# Altium PCB STM32P100.PcbDoc (part 1 of 2)
Units mil, origin at the board's own origin, x right, y up, seen from the top; angles counter-clockwise.
Board outline 4100 x 1945 mil, 2 copper layers (Top Layer, Bottom Layer); 85 components, 168 nets, 446 pads, 248 vias.
Unrouted connection lines stored in the file: 48.
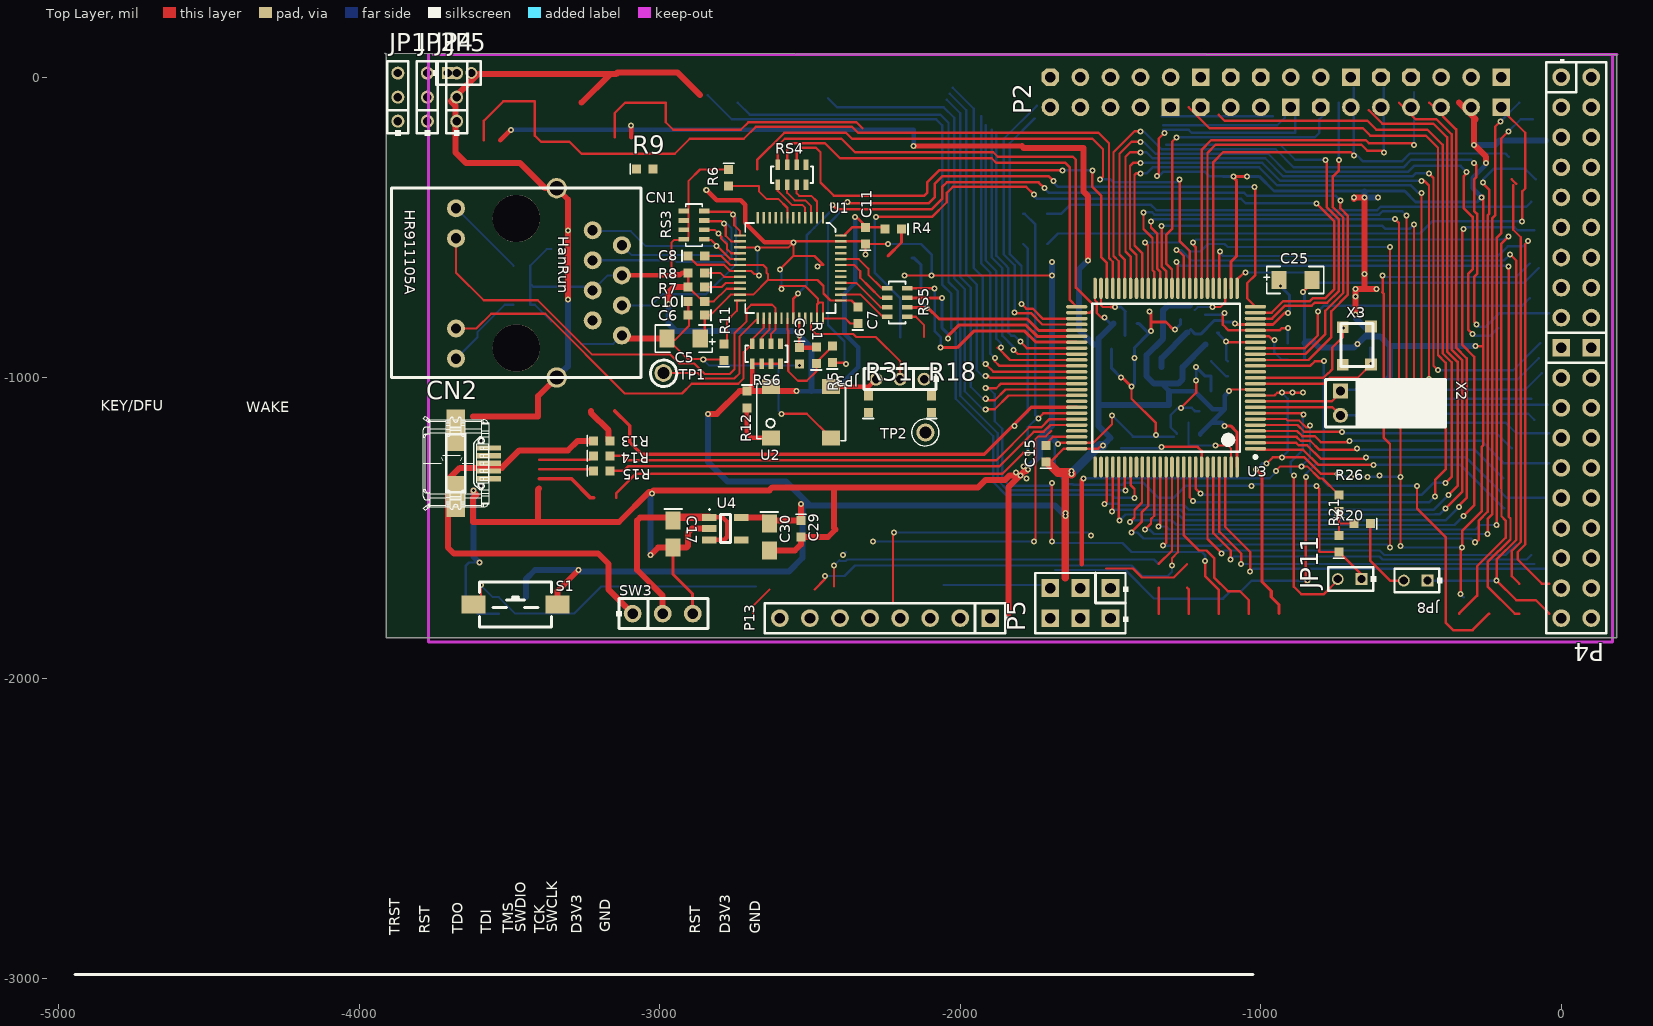
[diagram p0: Top Layer view]
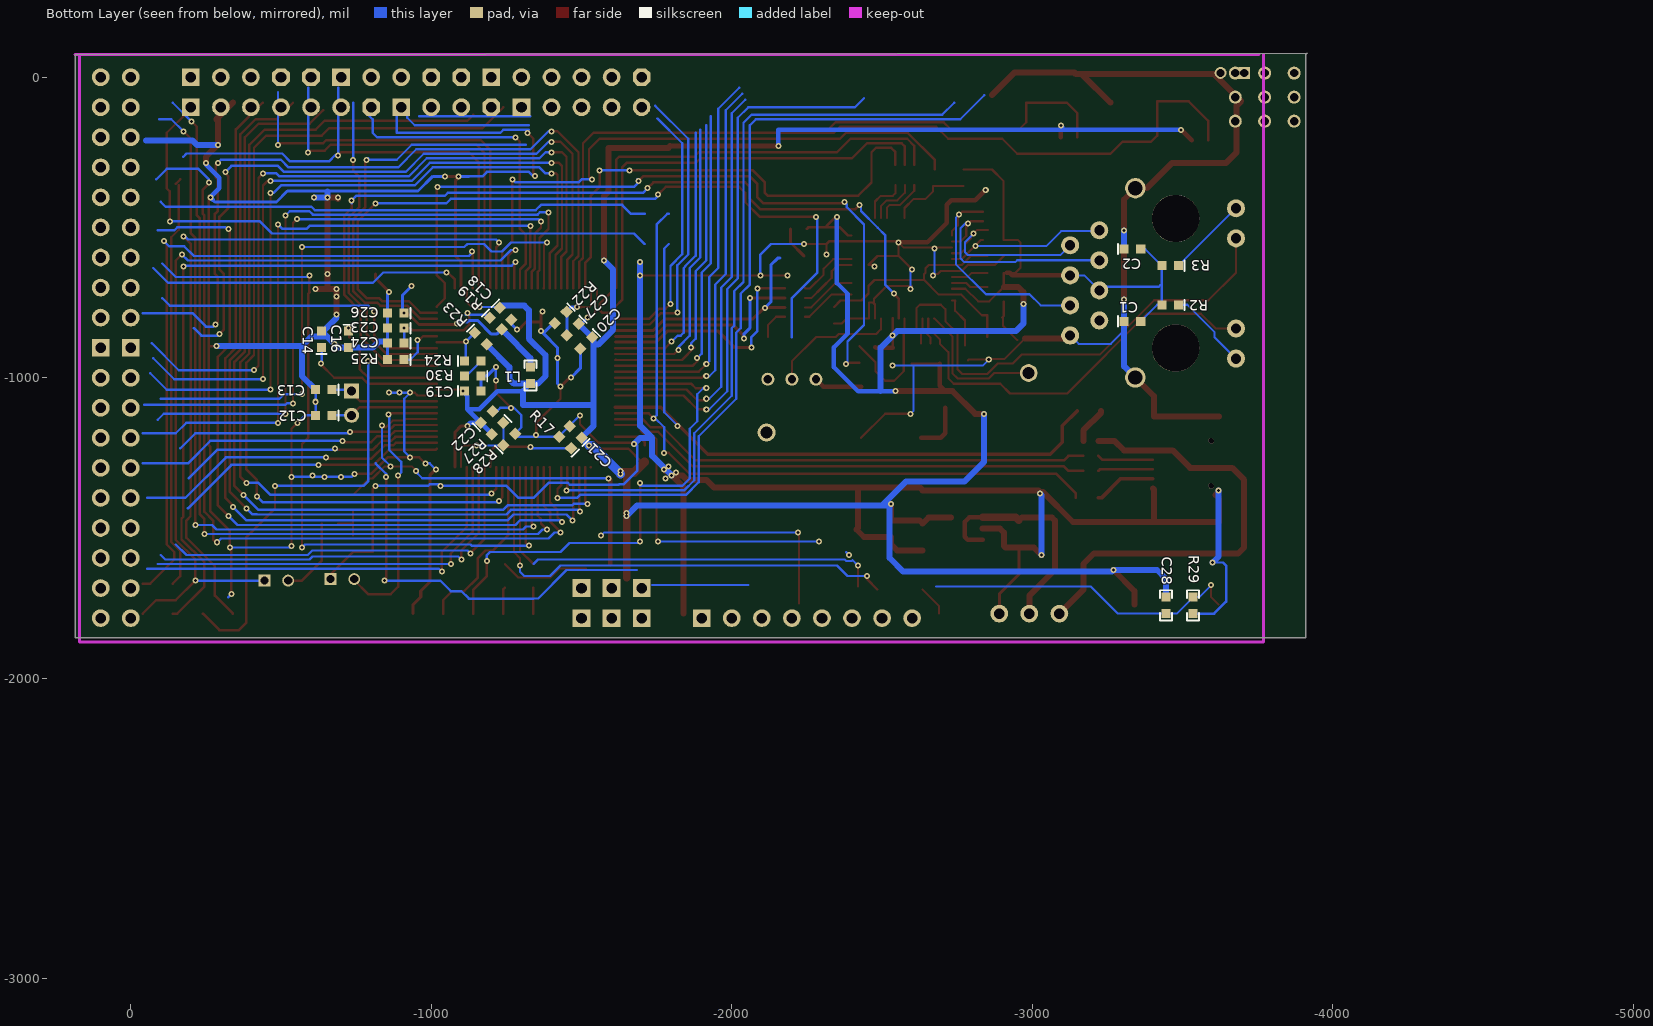
[diagram p1: Bottom Layer view, seen from below]

## Layer stack, top to bottom
Top Solder: solder mask 0.4, Solder Resist, Dk 3.5
Top Layer: signal copper 1.4
Dielectric1: dielectric 12.6, FR-4, Dk 4.8
Bottom Layer: signal copper 1.4
Bottom Solder: solder mask 0.4, Solder Resist, Dk 3.5

## Board outline
-3915,80 -3910,75 -3910,-1865 185,-1865 185,75

## Design rules (kind name [scope] priority, off if disabled: settings)
Clearance [All] p1: gap=7
PolygonConnect [All] p1: connectstyle=Relief reliefconductorwidth=10 reliefentries=4 polygonreliefangle="90 Angle" airgapwidth=10
RoomDefinition DP83848 [InComponentClass('DP83848')] p1: confinementstyle=ConfineIn formatcopy=TRUE lockcomponents=FALSE outline -3770,-1880 185,-1880 185,77.06 -3770,77.06
RoomDefinition STM32P100 [InComponentClass('STM32P100')] p2: confinementstyle=ConfineIn formatcopy=TRUE lockcomponents=FALSE outline -3765,-1875 185,-1875 185,77.5 -3765,77.5
RoutingVias [All] p1: holewidth=28 width=50 viastyle="Through Hole" minholewidth=10 minwidth=20 maxholewidth=10 maxwidth=20
SilkToSolderMaskClearance SilkscreenOverComponentPads [IsPad] p1: minsilkscreentomaskgap=10 clearancetoexposedcopper=TRUE
SolderMaskExpansion [All] p1: expansion=4
Width [All] p1: maxlimit=35 minlimit=7 preferedwidth=10 minimp=50.000000 maximp=50.000000 favimp=50.000000
28 further rules are at their usual default settings.

## Classes and differential pairs
component class DP83848: C1 C2 C5 C6 C7 C8 C9 C10 C11 CN1 JP3 R1 R2 R3 R4 R5 R6 R7 R8 R9 R11 R12 R18 R31 RS3 RS4 RS5 RS6 TP1 TP2 U1 U2
component class STM32P100: C12 C13 C14 C15 C16 C17 C18 C19 C20 C21 C22 C23 C24 C25 C26 C27 C28 C29 C30 CN2 JP1 JP2 JP4 JP5 JP8 JP11 L1 P2 P4 P5 P13 R13 R14 R15 R17 R19 R20 R21 R22 R23 R24 R25 R26 R27 R28 R29 R30 S1 SW3 U3 U4 X2 X3

## Components (designator, comment, footprint, x,y, rotation, side; value= is the part's Value field where it differs from the comment)
C1 "100nF" 0603M -3305.79,-812.32 r180 bottom
C2 "100nF" 0603M -3305.79,-572.32 r180 bottom
C5 "10uF" TAN-A -2920,-870 r0 top
C6 "100nF" 0603M -2850,-792 r180 top
C7 "100nF" 0603M -2340,-820 r90 top
C8 "100nF" 0603M -2905,-595 r0 top
C9 "100nF" 0603M -2535,-900 r270 top
C10 "100nF" 0603M -2905,-746 r0 top
C11 "100nF" 0603M -2315,-555 r90 top
C12 "10pF" 0603M -670,-1125 r0 bottom
C13 "10pF" 0603M -670,-1040 r0 bottom
C14 "20pF" 0603M -635,-900 r90 bottom
C15 "0.1uF" 0603M -1715,-1280 r90 top
C16 "20pF" 0603M -725,-845 r270 bottom
C17 "1uF" 0805M -2955,-1475 r270 top
C18 "100nF" 0603M -1227.5,-767.5 r225 bottom
C19 "100nF" 0603M -1110,-1045 r180 bottom
C20 "100nF" 0603M -1535,-865 r315 bottom
C21 "100nF" 0603M -1500,-1200 r45 bottom
C22 "100nF" 0603M -1165,-1150 r135 bottom
C23 "100nF" 0603M -910,-835 r0 bottom
C24 "1uF" 0603M -910,-885 r0 bottom
C25 "1uF" TAN-A -885,-675 r180 top
C26 "100nF" 0603M -910,-785 r0 bottom
C27 "0.1uF" 0603M -1490,-820 r315 bottom
C28 "10uF" 0603L -3445,-1785 r270 bottom
C29 "0.1uF" 0603M -2530,-1475 r270 top
C30 "10uF" 0805M -2635,-1485 r270 top
CN1 "HR911105A" HR911105A -2525.79,-97.32 r90 top
CN2 "USB-Micro" USB-MICRO-Female -3675,-1285 r90 top
JP1 "" HDR1X3/2.00MM -3871.06,-146.44 r90 top
JP2 "" HDR1X3/2.00MM -3773.19,-146.44 r90 top
JP3 "" HDR1X3/2.00MM -2120,-1005 r180 top
JP4 "" HDR1X2/2.00MM -3705,14.19 r0 top
JP5 "" HDR1X3/2.00MM -3675.32,-146.44 r90 top
JP8 "" HDR1X2/2.00MM -445,-1675 r180 top
JP11 "" HDR1X2/2.00MM -665,-1670 r180 top
L1 "BEAD" 0603L -1330,-1020 r270 bottom
P2 "WIKIPRHL-R" WIKIPRHL-R -200,0 r180 top locked
P4 "WIKIGPIO-FULL" WIKIGPIO-FULL 0,0 r270 top locked
P5 "WIKIPWR" WIKIPWR -1500,-1700 r180 top locked
P13 "Header 8" HDR1X8/2.54MM -1900,-1800 r180 top
R1 "1K5-NP" 0603M -2478,-953 r90 top
R2 "240R" 0603M -3485.79,-757.32 r0 bottom
R3 "240R" 0603M -3485.79,-627.32 r0 bottom
R4 "2K2" 0603M -2195,-505 r180 top
R5 "0R" 0603M -2425,-950 r90 top
R6 "2K2" 0603M -2770.79,-307.32 r270 top
R7 "2K2" 0603M -2850,-698 r180 top
R8 "2K2" 0603M -2850,-651 r180 top
R9 "2K2" 0603M -3077.13,-306 r0 top
R11 "4.87K" 0603M -2785.79,-942.32 r90 top
R12 "10K" 0603M -2710,-1045 r270 top
R13 "0R" 0603M -3220,-1210 r0 top
R14 "22R" 0603M -3220,-1260 r0 top
R15 "22R" 0603M -3220,-1310 r0 top
R17 "10K" 0603M -1465,-1235 r45 bottom
R18 "10K" 0603M -2095,-1115 r90 top
R19 "47" 0603M -1195,-800 r225 bottom
R20 "20K(1%)" 0603M -740,-1580 r90 top
R21 "0R" 0603M -635,-1485 r180 top
R22 "0R" 0603M -1450,-780 r315 bottom
R23 "0R" 0603M -1145,-850 r225 bottom
R24 "0R" 0603M -1110,-945 r180 bottom
R25 "0R" 0603M -910,-940 r0 bottom
R26 "10K(1%)" 0603M -740,-1445 r90 top
R27 "0R" 0603M -1240,-1150 r315 bottom
R28 "0R" 0603M -1240,-1225 r135 bottom
R29 "10K" 0603L -3535,-1785 r270 bottom
R30 "0R" 0603M -1165,-995 r0 bottom
R31 "0R" 0603M -2305,-1115 r90 top
RS3 "50R" RES-4B -2885.79,-492.32 r270 top
RS4 "33R" RES-4B -2560,-325 r0 top
RS5 "33R" RES-4B -2210,-750 r270 top
RS6 "2K2" RES-4B -2645,-920 r0 top
S1 "RESET" "KEY 6.1*4.0mm" -3480,-1755 r0 top
SW3 "Power" HDR1X3/2.54MM -3090,-1785 r0 top
TP1 "50MHz" "TP HOLE" -2980.79,-987.32 r0 top
TP2 "OSCIN" TP -2115.79,-1182.32 r0 top
U1 "DP83848CVV" LQFP48 -2565,-635 r180 top
U2 "OSC-50.0MHz" XTAL_5X7 -2630,-1200 r90 top
U3 "STM32F107VCT" LQFP100_N -1315,-1000 r180 top
U4 "LDO-3V3" SOT23-5 -2835,-1465 r270 top
X2 "32.768KHz" XTAL_32 -785,-1085 r0 top
X3 "Crystal3225" osc3225 -515,-850 r180 top

## Footprints (in the part's own frame and the unit in brackets; to place one, negate y for a bottom-side part, rotate by r counter-clockwise, add the part's x,y. Pads: shape width x height; smd on the part's side, far side on the other; paste and mask are expansions set on the pad)
0603L [mil]
  rect 30x30 smd: 1(0,0) 2(-55,0)
  silkscreen extent -78,-20 23,20
0603M [mil]
  rect 30x30 smd: 1(0,0) 2(55,0)
  silkscreen extent -21,-17 -21,18, body extent -5,-15 60,15, height 43
0805M [mil]
  rect 60x50 smd: 1(0,0) 2(90,0)
  silkscreen extent -38,-29 -38,29
HDR1X2/2.00MM [mm] "Connector; Header; 2 Position"
  rect 1x1 hole 0.7: 1(0,0)
  round 1 hole 0.7: 2(2,0)
  silkscreen extent -1.27,-1 2.79,1
HDR1X3/2.00MM [mm]
  round 1.1 hole 0.7: 1(0,0) 2(2.032,0) 3(4.064,0)
  silkscreen extent -1.24,-0.89 5.08,0.89
HDR1X3/2.54MM [mm]
  round 1.5 hole 0.9: 1(0,0) 2(2.54,0) 3(5.08,0)
  silkscreen extent -1.4,-1.27 6.38,1.27
HDR1X8/2.54MM [mm] "Connector; Header; 8 Position"
  rect 1.5x1.5 hole 0.9: 1(0,0)
  round 1.5 hole 0.9: 2(2.54,0) 3(5.08,0) 4(7.62,0) 5(10.16,0) 6(12.7,0) 7(15.24,0) 8(17.78,0)
  silkscreen extent -1.52,-1.27 19.05,1.27
HR911105A [mil] "Rev-B,HanRun RJ45 20120615"
  round 157.48 hole 157.48: 0(-804,951) 0(-373,951)
  round 60 hole 33.46: 1(-412,697) 2(-462,600.19) 3(-512,697) 4(-562,600.19) 5(-612,697) 6(-662,600.19) 7(-712,697) 8(-762,600.19)
  round 60 hole 34.65: 9(-339,1152) 10(-439,1152) 11(-739,1152) 12(-839,1152)
  round 67.87 hole 47.24: 13(-902,817) 14(-272,817)
  silkscreen extent -902,537 -272,1367
"KEY 6.1*4.0mm" [mil]
  rect 80x60 smd: 1(-140,0) 2(140,0)
  silkscreen extent -120,-75 120,75
LQFP48 [mm]
  rect 0.2x1 smd: 1(-2.75,-4.25) 2(-2.25,-4.25) 3(-1.75,-4.25) 4(-1.25,-4.25) 5(-0.75,-4.25) 6(-0.25,-4.25) 7(0.25,-4.25) 8(0.75,-4.25) 9(1.25,-4.25) 10(1.75,-4.25) 11(2.25,-4.25) 12(2.75,-4.25) 25(2.75,4.25) 26(2.25,4.25) 27(1.75,4.25) 28(1.25,4.25) 29(0.75,4.25) 30(0.25,4.25) 31(-0.25,4.25) 32(-0.75,4.25) 33(-1.25,4.25) 34(-1.75,4.25) 35(-2.25,4.25) 36(-2.75,4.25)
  rect 1x0.2 smd: 13(4.25,-2.75) 14(4.25,-2.25) 15(4.25,-1.75) 16(4.25,-1.25) 17(4.25,-0.75) 18(4.25,-0.25) 19(4.25,0.25) 20(4.25,0.75) 21(4.25,1.25) 22(4.25,1.75) 23(4.25,2.25) 24(4.25,2.75) 37(-4.25,2.75) 38(-4.25,2.25) 39(-4.25,1.75) 40(-4.25,1.25) 41(-4.25,0.75) 42(-4.25,0.25) 43(-4.25,-0.25) 44(-4.25,-0.75) 45(-4.25,-1.25) 46(-4.25,-1.75) 47(-4.25,-2.25) 48(-4.25,-2.75)
  silkscreen extent -3.81,-3.81 3.81,3.81
LQFP100_N [mm]
  oval 1.8x0.3 smd: 1(-7.55,6) 2(-7.55,5.5) 3(-7.55,5) 4(-7.55,4.5) 5(-7.55,4) 6(-7.55,3.5) 7(-7.55,3) 8(-7.55,2.5) 9(-7.55,2) 10(-7.55,1.5) 11(-7.55,1) 12(-7.55,0.5) 13(-7.55,0) 14(-7.55,-0.5) 15(-7.55,-1) 16(-7.55,-1.5) 17(-7.55,-2) 18(-7.55,-2.5) 19(-7.55,-3) 20(-7.55,-3.5) 21(-7.55,-4) 22(-7.55,-4.5) 23(-7.55,-5) 24(-7.55,-5.5) 25(-7.55,-6) 51(7.55,-6) 52(7.55,-5.5) 53(7.55,-5) 54(7.55,-4.5) 55(7.55,-4) 56(7.55,-3.5) 57(7.55,-3) 58(7.55,-2.5) 59(7.55,-2) 60(7.55,-1.5) 61(7.55,-1) 62(7.55,-0.5) 63(7.55,0) 64(7.55,0.5) 65(7.55,1) 66(7.55,1.5) 67(7.55,2) 68(7.55,2.5) 69(7.55,3) 70(7.55,3.5) 71(7.55,4) 72(7.55,4.5) 73(7.55,5) 74(7.55,5.5) 75(7.55,6)
  oval 0.3x1.8 smd: 26(-6,-7.55) 27(-5.5,-7.55) 28(-5,-7.55) 29(-4.5,-7.55) 30(-4,-7.55) 31(-3.5,-7.55) 32(-3,-7.55) 33(-2.5,-7.55) 34(-2,-7.55) 35(-1.5,-7.55) 36(-1,-7.55) 37(-0.5,-7.55) 38(0,-7.55) 39(0.5,-7.55) 40(1,-7.55) 41(1.5,-7.55) 42(2,-7.55) 43(2.5,-7.55) 44(3,-7.55) 45(3.5,-7.55) 46(4,-7.55) 47(4.5,-7.55) 48(5,-7.55) 49(5.5,-7.55) 50(6,-7.55) 76(6,7.55) 77(5.5,7.55) 78(5,7.55) 79(4.5,7.55) 80(4,7.55) 81(3.5,7.55) 82(3,7.55) 83(2.5,7.55) 84(2,7.55) 85(1.5,7.55) 86(1,7.55) 87(0.5,7.55) 88(0,7.55) 89(-0.5,7.55) 90(-1,7.55) 91(-1.5,7.55) 92(-2,7.55) 93(-2.5,7.55) 94(-3,7.55) 95(-3.5,7.55) 96(-4,7.55) 97(-4.5,7.55) 98(-5,7.55) 99(-5.5,7.55) 100(-6,7.55)
  silkscreen extent -7.68,-6.25 6.25,6.82, body extent -7.51,-6.87 6.49,7.13, height 1.6
osc3225 [mil] "Length, width 3.2 *2.5mm, Height 1.3mm"
  round 19.68 on Top Overlay: 0(83,95)
  rect 39.37x39.37 smd: 1(118,106) 2(118,-20) 3(212,-18) 4(212,107)
  silkscreen extent 112,-30 218,113, body extent 112,-30 220,115, height 63
RES-4B [mil]
  rect 15.75x35 smd: 1(-47.24,-33.5) 2(-47.24,33.5) 3(-15.75,-33.5) 4(-15.75,33.5) 5(15.75,-33.5) 6(15.75,33.5) 7(47.24,-33.5) 8(47.24,33.5)
  silkscreen extent -70,-28 70,28
SOT23-5 [mm]
  rect 0.6x1.2 smd: 1(0,0) 2(0.95,0) 3(1.9,0) 4(1.9,2.7) 5(0,2.7)
  silkscreen extent -0.69,0 2.13,1.8, body extent -0.32,0.7 2.35,2.1, height 1.1
TAN-A [mil]
  rect 50x60 smd: 1(55,0) 2(-55,0)
  silkscreen extent -95,-45 105,45
TP [mil]
  round 60 hole 40: 1(0,0)
  silkscreen extent -45,-45 45,45
"TP HOLE" [mm] "TEST POINT"
  round 1.5 hole 1: 1(-0.178,0.076)
  silkscreen extent -1.27,-1.07 0.97,1.17
USB-MICRO-Female [mm] "Connector; USB2.0, Type B, SM; 5 Position; Right Angle"
  rect 3.5x1.6 smd: 0(-2.802,0.088) 0(2.798,0.088)
  rect 0.45x2 smd: 1(1.298,-2.714) 2(0.648,-2.714) 3(-0.002,-2.714) 4(-0.652,-2.714) 5(-1.302,-2.714)
  round 0.457 hole 0.457 unplated: MH1(-1.905,-2.032) MH2(1.905,-2.032)
  silkscreen extent -3.97,-2.74 3.98,2.83
WIKIGPIO-FULL [mm] "Connector; Header; 19x2 Position"
  round 1.5 hole 0.9: 1(0,0) 2(0,2.54) 3(2.54,0) 4(2.54,2.54) 5(5.08,0) 6(5.08,2.54) 7(7.62,0) 8(7.62,2.54) 9(10.16,0) 10(10.16,2.54) 11(12.7,0) 12(12.7,2.54) 13(15.24,0) 14(15.24,2.54) 15(17.78,0) 16(17.78,2.54) 17(20.32,0) 18(20.32,2.54) 21(25.4,0) 22(25.4,2.54) 23(27.94,0) 24(27.94,2.54) 25(30.48,0) 26(30.48,2.54) 27(33.02,0) 28(33.02,2.54) 29(35.56,0) 30(35.56,2.54) 31(38.1,0) 32(38.1,2.54) 33(40.64,0) 34(40.64,2.54) 35(43.18,0) 36(43.18,2.54) 37(45.72,0) 38(45.72,2.54)
  rect 1.5x1.5 hole 0.9: 19(22.86,0) 20(22.86,2.54)
  silkscreen extent -1.52,-1.27 46.99,3.81
WIKIPRHL-R [mm] "Connector; Header; 16x2 Position"
  rect 1.5x1.5 hole 0.9: 1(0,0) 2(0,2.54) 11(12.7,0) 16(17.78,2.54) 21(25.4,0) 24(27.94,2.54)
  round 1.5 hole 0.9: 3(2.54,0) 4(2.54,2.54) 5(5.08,0) 6(5.08,2.54) 8(7.62,2.54) 10(10.16,2.54) 12(12.7,2.54) 13(15.24,0) 15(17.78,0) 18(20.32,2.54) 20(22.86,2.54) 23(27.94,0) 25(30.48,0) 26(30.48,2.54) 27(33.02,0) 28(33.02,2.54) 29(35.56,0) 30(35.56,2.54) 32(38.1,2.54)
  oct 1.5x1.5 hole 0.9: 7(7.62,0) 9(10.16,0) 14(15.24,2.54) 17(20.32,0) 19(22.86,0) 22(25.4,2.54) 31(38.1,0)
WIKIPWR [mm] "Connector; Header; 3x2 Position"
  rect 1.5x1.5 hole 0.9: 1(0,0) 2(0,2.54) 3(2.54,0) 4(2.54,2.54) 5(5.08,0) 6(5.08,2.54)
  silkscreen extent -1.52,-1.27 6.35,3.81
XTAL_5X7 [mil]
  rect 50x60 smd: 1(0,0) 2(0,-200) 3(170,-200) 4(170,0)
  silkscreen extent -10,-248 180,47
XTAL_32 [mil] "Length, width 3.2 *2.5mm, Height 1.3mm"
  rect 50x50 hole 30: 1(50,40)
  round 50 hole 30: 2(50,-40)
  silkscreen extent 0,-79 400,79

## Part data
C1 C2 C6 C7 C8 C9 C10 C11 C12 C13 C14 C16: library part CAP, "Capacitor"
C5 C25: library part "Cap Pol1", "Polarized Capacitor (Radial)"
C15 C17 C18 C19 C20 C21 C22 C23 C24 C26 C27 C28 C29 C30: library part Cap, "Capacitor"
CN1: "RJ45 From Hanren"
JP1 JP2 JP3 JP5: library part Jumper3
JP4 JP8 JP11: library part JP2
L1: library part Inductor, "Inductor"
P2: "Header, 16-Pin, Dual row"
P4: "Header, 19-Pin, Dual row"
P5: "PWR HDR"
P13: "Header, 8-Pin"
R1 R2 R3 R4 R5 R6 R7 R8 R9 R11 R12 R18 R19 R31: library part Res1, "Resistor"
R13 R14 R15 R22 R23 R24 R25 R27 R28 R29 R30: library part Res2, "Resistor"
R17 R20 R21 R26: library part res1, "Resistor"
RS3 RS4 RS5 RS6: library part "Resister Array"
S1: library part SW-PB, "Switch"
SW3: library part SW-SPDT, "SPDT Subminiature Toggle Switch, Right Angle Mounting, Vertical Actuation"
TP1 TP2: library part TP
U2: library part SM7745HEV-50.0M
U3: library part BARRACUDA_256K
U4: library part XC6219, "LDO"
X2: library part CRYSTAL, "Crystal"
X3: library part Crystal322

## Via types
v1: diameter 20, hole 10, Top Layer to Bottom Layer, 248 vias

## Nets (pads, with @x,y where several pads share a name; then routed paths per layer and width w, separated by ;. In a path a pad name is that pad's centre, name@x,y a point inside that pad or via, vN(x,y) a via of type N, cw(c..) or ccw(c..) an arc to the next point about the centre after c; other vN are vias at no path point)
ADC_IN1: JP8.1 U3.35 | length 2849.4
  Top Layer w8: v1(-1280,-575) -1280,-570.94 -1255.94,-595 U3.35@-1255.94,-702.76 ; v1(-170,-590) -150,-610 -150,-1540 -215,-1605 v1(-215,-1675) -150,-1740 -85,-1740 -40,-1785
  Bottom Layer w8: v1(-1280,-575) -1265,-575 -1230,-610 -190,-610 v1(-170,-590) ; JP8.1@-445,-1675 v1(-215,-1675)
ADC_IN2: U3.36 | length 2442
  Top Layer w8: v1(-1280,-615) -1275.63,-619.37 U3.36@-1275.63,-702.76 ; v1(-175,-630) -175,-1462.88 -169,-1468.88 -169,-1537.79 -245,-1613.79 -245,-1695 -155,-1785 -140,-1785
  Bottom Layer w8: v1(-1280,-615) -1267.5,-627.5 -177.5,-627.5 v1(-175,-630)
ADC_IN3: U3.15 | length 1622.9
  Top Layer w8: U3.15@-1017.76,-960.63 -835.63,-960.63 -820,-945 v1(-790,-945) ; v1(-480,-1360) -480,-1435 -385,-1530 -385,-1815 -360,-1840 -295,-1840 -240,-1785
  Bottom Layer w8: v1(-790,-945) -790,-1345 -775,-1360 v1(-480,-1360)
ADC_IN4: U3.33 | length 2557.4
  Top Layer w8: v1(-1225,-550) -1227.5,-547.5 -1227.5,-554.07 -1216.57,-565 U3.33@-1216.57,-702.76 ; -340,-1785 -280,-1725 -280,-1627.57 -185,-1532.57 -185,-1475 -199,-1461 -199,-1367.66 -200,-1366.66 -200,-555 v1(-175,-530)
  Bottom Layer w8: v1(-1225,-550) -1215,-540 -190,-540 -180,-530 v1(-175,-530)
BAT: JP4.1 R26.2 U3.6 | length 1554.8
  Top Layer w7: U3.6@-1017.76,-1137.8 -915.19,-1137.8 -910,-1142.98 -871.51,-1142.98 -849.49,-1165 -840,-1165 -836,-1161 v1(-836,-1159) ; v1(-950,-1310) -935,-1295 v1(-865,-1295) -845,-1295 -804.49,-1335.51 -794.49,-1335.51 R26.2@-740,-1390
  Top Layer w15: -1595,-1620 -1595,-1340 v1(-1590,-1335)
  Bottom Layer w7: v1(-1590,-1335) -1585,-1340 -1579.5,-1334.5 -969.5,-1334.5 -955,-1320 -955,-1305 v1(-950,-1310) ; v1(-865,-1295) -836,-1266 v1(-836,-1159)
CAN1RX: U3.81 | length 2504.1
  Top Layer w8: U3.81@-1452.8,-1297.24 -1452.8,-1372.2 v1(-1450,-1375)
  Bottom Layer w8: -2740,-85 -2700,-125 -2065.57,-125 -2039,-151.57 -2039,-681 -2007.5,-712.5 -2007.5,-827.5 -2000,-835 -2000,-1060 -1875,-1185 -1875,-1341.21 -1841.21,-1375 v1(-1450,-1375)
CAN1TX: U3.82 | length 2686.3
  Top Layer w8: U3.82@-1433.11,-1297.24 -1433.11,-1356.89 -1420,-1370 -1420,-1395 -1425,-1400 v1(-1420,-1400)
  Bottom Layer w8: -2840,-60 -2760,-140 -2080,-140 -2060,-160 -2060,-689.85 -2030,-719.85 -2030,-835 -2015,-850 -2015,-1070 -1890,-1195 -1890,-1347.43 -1847.43,-1390 -1495,-1390 -1485,-1400 v1(-1420,-1400)
CRSDV: R4.1 RS5.6 | length 108
  Top Layer w10: -2239.53,-594.53 -2195,-550 R4.1@-2195,-505
D3V3: C1.2 C2.2 C9.1 C10.2 C11.2 C15.1 C18.1 C19.1 C20.1 C21.1 C22.1 C27.1 C29.1 C30.1 CN1.4 CN1.5 JP4.2 L1.1 P5.1 P13.1 R1.2 R2.2 R3.2 R4.2 R6.1 R7.2 R8.2 R9.2 R12.1 R18.2 R23.2 R27.2 R29.2 RS3.1 RS3.3 RS3.5 RS3.7 RS6.1 RS6.3 RS6.5 RS6.7 U1.22 U1.32 U1.48 U2.4 U3.11 U3.28 U3.50 U3.75 U3.100 U4.5 | length 13200.6
  Top Layer w7: -2924.5,-651 -2944,-651 -2960,-635 -2960,-549.49 -2952.76,-542.24 -2903.5,-542.24 -2903.5,-345.04 -2865.79,-307.32 R6.1@-2770.79,-307.32 ; R8.2@-2915,-651 R8.2@-2905,-651 R7.2@-2905,-698 -2857,-746 C10.2@-2850,-746 -2819.46,-746 -2777.36,-703.9 U1.22@-2732.32,-703.9 ; RS6.1@-2692.24,-953.5 RS6.3@-2660.75,-953.5 RS6.5@-2629.25,-953.5 RS6.7@-2597.76,-953.5 ; U3.50@-1551.22,-702.76 -1551.22,-743.27 -1545.5,-748.99 -1545.5,-784.5 -1530,-800 v1(-1520,-800) ; v1(-1160,-765) -1135,-765 -1118.15,-748.15 U3.28@-1118.15,-702.76 ; v1(-1105,-1045) -1099.37,-1039.37 U3.11@-1017.76,-1039.37
  Top Layer w8: U1.32@-2535.47,-802.32 v1(-2535.47,-860) -2535.47,-899.53 C9.1@-2535,-900 ; U1.48@-2397.68,-526.73 -2386.73,-526.73 -2360,-500 C11.2@-2315,-500 ; v1(-2350,-465) -2345,-465 -2315,-495 C11.2@-2315,-500 ; R4.2@-2250,-505 -2255,-500 C11.2@-2315,-500 ; C15.1@-1710,-1280 -1700,-1280 -1656.22,-1236.22 U3.75@-1612.24,-1236.22 -1541.22,-1236.22 -1530,-1225 v1(-1525,-1225)
  Top Layer w10: v1(-1120,-1160) -1100,-1160 -1078.78,-1181.22 U3.100@-1078.78,-1297.24
  Top Layer w15: -3530,-210 v1(-3495,-175) ; CN1.4@-3125.98,-659.32 -2932.82,-659.32 -2924.5,-651 R8.2@-2915,-651 ; -3095,-200 v1(-3095,-160) ; R12.1@-2710,-1045 -2692.24,-1027.24 RS6.1@-2692.24,-953.5 ; C9.1@-2535,-900 -2480,-900 R1.2@-2478,-898 ; v1(-2155,-229) -1795,-229
  Top Layer w20: -3340,-1755 -3340,-1710 v1(-3270,-1640) ; v1(-2970,-755) -2970,-715 -2953,-698 R7.2@-2905,-698 ; v1(-2840,-1120) -2809.47,-1120 -2734.47,-1045 R12.1@-2710,-1045 v1(-2545,-1045) ; U4.5@-2728.7,-1465 -2655,-1465 C30.1@-2635,-1485 -2625,-1475 C29.1@-2530,-1475 v1(-2530,-1420) ; -1795,-229 -1789,-235 -1590,-235 -1590,-380 -1575,-395 v1(-1575,-610)
  Top Layer w25: -1650,-1665 v1(-1650,-1460) v1(-1650,-1450) -1650,-1330 v1@-1635,-1315
  Top Layer w30: C15.1@-1710,-1280 -1675,-1315 -1635,-1315 v1(-1630,-1320)
  Bottom Layer w7: C1.2@-3360.79,-812.32 -3415.79,-757.32 R2.2@-3430.79,-757.32 -3430.79,-692.32 ; C2.2@-3360.79,-572.32 -3375.79,-572.32 R3.2@-3430.79,-627.32 -3430.79,-692.32 ; CN1.4@-3125.98,-659.32 -3172.79,-659.32 CN1.5@-3222.79,-709.32 -3234.79,-697.32 -3420.79,-697.32 -3425.79,-692.32 -3430.79,-692.32 ; C18.1@-1220,-775 -1210,-765 v1(-1160,-765) ; C19.1@-1110,-1045 v1(-1105,-1045)
  Bottom Layer w8: v1(-1525,-1225) -1517.5,-1217.5
  Bottom Layer w10: v1(-1520,-800) -1500,-820 C27.1@-1490,-820
  Bottom Layer w15: v1(-3495,-175) -3090,-175 ; v1(-3095,-160) -3100,-165 -3090,-175 ; v1(-2545,-1045) -2495,-1045 -2420,-1045 -2340,-965 -2340,-898.84 -2385,-853.84 -2385,-720 -2350,-685 v1(-2350,-465) ; v1(-2155,-229) -2155,-175 -3090,-175
  Bottom Layer w16: L1.1@-1330,-1020 -1305,-1045 -1220,-1045 -1160,-1105 -1120,-1105 ; R27.2@-1201.11,-1188.89 -1201.11,-1186.11 C22.1@-1165,-1150 ; v1(-1120,-1160) -1130,-1150 C22.1@-1165,-1150 ; v1(-1105,-1045) -1120,-1060 -1120,-1105 ; C22.1@-1165,-1150 -1120,-1105
  Bottom Layer w20: -3445,-1730 -3445,-1670 -3415,-1640 v1(-3270,-1640) -3265,-1645 -2570,-1645 -2525,-1600 v1@-2525,-1425 ; v1(-2970,-755) -2970,-820 -2945,-845 -2550.47,-845 v1(-2535.47,-860) -2535,-860 -2495,-900 -2495,-1045 ; v1(-2840,-1120) -2840,-1280 -2775,-1345 -2580,-1345 -2500,-1425 ; v1(-2530,-1420) v1@-2525,-1425 ; v1(-1650,-1460) -1685,-1425 -2500,-1425 ; v1(-1575,-610) -1605,-640 -1605,-840 -1555,-890 -1540,-890 ; -1517.5,-1217.5 C21.1@-1500,-1200 -1540,-1160 -1540,-1090 ; C27.1@-1490,-820 C20.1@-1535,-865 -1540,-870 -1540,-890 ; -1305,-1045 -1305,-1090 -1540,-1090 ; C18.1@-1235,-760 -1310,-760 -1325,-775 -1325,-870 -1380,-925 -1380,-995 -1355,-1020 L1.1@-1330,-1020 -1275,-1020 -1260,-1005 -1260,-965 R23.2@-1183.89,-888.89 ; v1@-2525,-1425 -2500,-1425 ; -1540,-1090 -1540,-890
  Bottom Layer w30: v1(-1630,-1320) -1535,-1225 v1(-1525,-1225)
  other v1: -1630,-1310
DAC_OUT1: U3.29 | length 2396.1
  Top Layer w8: U3.29@-1137.83,-702.76 -1137.83,-577.83 -1135.67,-580 v1(-1135,-580) ; v1(-110,-545) -120,-555 -120,-1555 -145,-1580 -145,-1605 -65,-1685 -40,-1685
  Bottom Layer w8: v1(-1135,-580) -1135,-585 -1125,-595 -210.3,-595 -177.65,-562.35 -127.35,-562.35 v1(-110,-545)
DAC_OUT2: JP1.1
DSCS#: P2.10
EXINT0: P2.31
EXINT2: P2.14
EXINT3: P2.17
GND: C1.1 C2.1 C5.2 C6.2 C7.1 C8.1 C9.2 C10.1 C11.1 C12.2 C13.2 C14.2 C16.2 C17.2 C18.2 C19.2 C20.2 C21.2 C22.2 C23.2 C24.2 C25.2 C26.2 C28.1 C29.2 C30.2 CN1.8 CN1.13 CN1.14 CN2.0 CN2.5 JP11.1 P2.1 P2.2 P2.11 P2.16 P2.21 P2.24 P4.20 P5.4 P13.2 R11.1 R17.2 R20.1 R22.2 R25.2 R28.2 R30.1 S1.1 SW3.3 U1.15 U1.19 U1.35 U1.36 U1.47 U2.2 U3.10 U3.27 U3.74 U4.2 | length 23428.8
  Top Layer w7: C5.2@-2975,-870 -2906.68,-938.32 -2856.68,-938.32 v1(-2855,-940) -2788.11,-940 R11.1@-2785.79,-942.32 ; -2950,-875 -2902.5,-827.5 C6.2@-2902.5,-797.5 ; C10.1@-2905,-746 C6.2@-2905,-792 -2905,-795 C6.2@-2902.5,-797.5 ; C8.1@-2905,-595 -2876,-624 -2786,-624 -2765.16,-644.84 U1.19@-2732.32,-644.84 -2695.16,-644.84 -2685,-655 -2675,-655 v1(-2670,-660) ; C6.2@-2900,-800 C6.2@-2902.5,-797.5 ; U1.15@-2732.32,-566.1 -2571.1,-566.1 v1(-2555,-550) -2555,-595 ; v1@-2604.84,-644.84 v1(-2600,-640) -2555,-595 ; v1(-2595,-1120) -2510,-1120 U2.2@-2430,-1200 ; v1(-2595,-705) -2595,-700 -2600,-695 -2515,-695 -2473.21,-736.79 -2473.21,-753.21 ; v1(-2535,-960) C9.2@-2535,-955 ; U1.35@-2476.42,-802.32 -2476.42,-756.42 -2473.21,-753.21 ; v1(-2475,-630) -2470,-625 -2455,-625 -2485,-595 -2555,-595 ; C7.1@-2340,-820 -2365,-820 -2382.68,-802.32 U1.36@-2456.73,-802.32 -2456.73,-750 -2470,-750 -2473.21,-753.21
  Top Layer w8: v1(-2555,-550) -2551.42,-546.42 U1.47@-2397.68,-546.42 -2323.58,-546.42 C11.1@-2315,-555 ; v1(-2315,-590) C11.1@-2315,-555 ; v1(-2240,-555) C11.1@-2315,-555 ; v1(-2185,-660) v1(-2095,-660) v1(-1695,-660) ; v1(-1675,-1220) -1671.54,-1216.54 U3.74@-1612.24,-1216.54 -1556.54,-1216.54 -1495,-1155 v1(-1495,-1125) ; v1(-1430,-1030) -1430,-1070 -1348.89,-1151.11 v1(-1348.89,-1190) v1@-1345,-1190 ; v1(-1345,-329) -1344,-330 -1340,-330 -1340,-205 v1(-1320,-185) ; v1(-1265,-1100) -1215,-1050 v1(-1215,-1010) ; U3.10@-1017.76,-1059.06 -954.06,-1059.06 -945,-1050 v1(-930,-1050) v1(-860,-1050) ; v1(-980,-1285) -960,-1265 v1(-930,-1265) -854.49,-1265 -799.49,-1320 v1(-745,-1320) ; v1(-815,-1360) -805,-1370 -805,-1580 R20.1@-740,-1580 -665,-1655 JP11.1@-665,-1670 ; v1(-555,-1150) -535,-1170 v1(-535,-1330) v1(-535,-1560) ; v1(-335,-1720) -335,-1570 v1(-330,-1565) -330,-1510 -265,-1445 -265,-1230 -260,-1225 -260,-895 ; v1(-285,-895) -260,-895 ; v1(-265,-400) -260,-395 -260,-895
  Top Layer w10: C17.2@-2955,-1565 -2955,-1655 -2890,-1720 SW3.3@-2890,-1785 ; v1(-1465,-1000) -1460,-1000 v1(-1430,-1030) ; v1(-1370,-780) -1365,-785 -1365,-815 ; v1(-1365,-845) -1365,-815 ; v1(-1285,-840) -1290,-840 -1315,-815 -1365,-815 ; U3.27@-1098.46,-702.76 -1098.46,-613.46 -1080,-595 -1080,-345 -1090,-335 v1(-1090,-330) v1(-1045,-330) ; v1(-1015,-1305) -995,-1325 -995,-1680 -965,-1710 -965,-1730 -940,-1755 -940,-1785 ; v1(-860,-715) -815,-670 C25.2@-815,-655
  Top Layer w15: v1(-2845,-375) -2810,-410 -2730,-410 -2715,-425 -2715,-485 -2650,-550 v1(-2555,-550)
  Top Layer w20: -3621.42,-1129.8 -3404.88,-1129.8 -3404.88,-1061.42 CN1.13@-3342.79,-999.32 ; v1(-3620,-1375) -3620,-1380 -3610,-1390 -3621.42,-1401.42 -3621.42,-1480.2 -3404.88,-1480.2 ; -3400.94,-1367.99 -3404.88,-1371.93 -3404.88,-1480.2 ; v1(-3305,-740) v1(-3305,-510) -3305,-407.11 CN1.14@-3342.79,-369.32 -3380.68,-369.32 -3465,-285 -3645,-285 -3680,-250 -3680,-95 -3695,-80 -3605,10 -3165,10 ; -3260,-85 -3165,10 ; CN1.8@-3125.98,-859.32 -3115.3,-870 C5.2@-2975,-870 ; v1(-3030,-1590) -3005,-1565 C17.2@-2955,-1565 -2910,-1565 -2905,-1560 -2905,-1515 -2892.4,-1502.4 U4.2@-2835,-1502.4 ; v1(-3025,-1385) v1@-3025,-1380 ; -2865,-60 -2940,15 -3140,15 -3145,10 -3165,10 ; C30.2@-2635,-1575 -2550,-1575 -2530,-1555 C29.2@-2530,-1530 -2440,-1530 -2415,-1505 -2420,-1500 -2420,-1365 ; -1840,-1785 -1840,-1365 v1(-1800,-1325) ; v1@-1780,-1310 -1785,-1310 v1(-1800,-1325) ; v1(-690,-400) -690,-405 -685,-400 v1(-655,-400) v1(-655,-655) -655,-705 ; v1(-685,-790) v1(-685,-730) v1(-685,-705) -655,-705 ; v1(-615,-705) -655,-705 ; -340,-85 -285,-140 -290,-140 v1(-290,-225) -250,-265 v1(-250,-285) ; -3404.88,-1480.2 -3135.2,-1480.2 -3035,-1380 v1@-3025,-1380 ; v1@-3025,-1380 -3020,-1375 -2635,-1375 -2625,-1365 -2420,-1365 ; -2420,-1365 -1940,-1365 -1916,-1341 -1851.3,-1341 -1835.3,-1325 v1(-1800,-1325)
  Bottom Layer w7: -3305.79,-842.32 -3260.79,-887.32 -3153.98,-887.32 CN1.8@-3125.98,-859.32 ; v1(-2855,-940) -2835,-960 -2605,-960 ; v1(-2675,-570) -2675,-655 v1(-2670,-660) ; v1(-2600,-640) -2595,-645 v1(-2595,-705) ; v1(-2595,-1120) -2605,-1110 -2605,-960 ; v1(-2535,-960) -2605,-960
  Bottom Layer w8: v1(-3600,-1615) -3635,-1615 -3645,-1625 -3645,-1745 -3605,-1785 -3535,-1785 ; v1(-2240,-555) -2130,-555 -2095,-590 v1(-2095,-660) ; v1(-1675,-1220) -1670,-1225 -1685,-1225 -1685,-1310 -1640,-1355 -1625,-1355 -1624,-1356 -1461,-1356 -1455,-1350 -1390,-1350 -1340,-1400 -1290,-1400 -1250,-1360 -1035,-1360 -1030,-1355 -995,-1355 -990,-1360 v1(-815,-1360) ; v1(-1495,-1125) -1426.11,-1193.89 R17.2@-1426.11,-1196.11 v1@-1355,-1196.11 ; v1(-1348.89,-1190) v1@-1355,-1196.11 ; v1(-1345,-329) -1339,-329 -1325,-315 -1185,-315 -1170,-330 -1125,-330 ; v1(-1320,-185) -1320,-180 -1325,-175 -1240,-175 -1230,-185 -885,-185 P2.16@-885,-120 ; R28.2@-1288.89,-1196.11 v1@-1355,-1196.11 ; R28.2@-1278.89,-1186.11 -1300,-1165 -1300,-1125 -1275,-1100 v1(-1265,-1100) -1230,-1100 -1218.89,-1111.11 C22.2@-1203.89,-1111.11 ; v1(-1215,-1010) v1(-1215,-965) ; v1(-1015,-1305) -995,-1285 v1(-980,-1285) ; v1(-930,-1265) -910,-1245 -910,-1070 v1(-930,-1050) v1(-860,-1050) ; v1(-745,-1320) -735,-1330 v1(-535,-1330) ; C13.2@-615,-1040 v1(-615,-1080) C12.2@-615,-1125 -580,-1125 v1(-555,-1150) ; v1(-535,-1560) -530,-1565 v1(-330,-1565) ; v1(-335,-1720) -325,-1730
  Bottom Layer w10: C20.2@-1496.11,-903.89 -1496.11,-968.89 v1(-1465,-1000) ; v1(-1430,-1030) -1420,-1020 v1(-1420,-935) -1420,-900 -1372.5,-852.5 ; R22.2@-1411.11,-818.89 -1406.11,-818.89 -1372.5,-852.5 ; v1(-1365,-845) -1372.5,-852.5 ; v1(-1285,-840) -1266.39,-821.39 C18.2@-1266.39,-806.39 ; v1(-1215,-965) -1185,-995 R30.1@-1165,-995 C19.2@-1165,-1045 ; -1125,-330 v1(-1090,-330) ; v1(-1045,-330) -1005,-330 -956,-379 -521,-379 -485,-415 -280,-415 -272.5,-407.5 ; v1(-860,-715) -855,-720 C26.2@-855,-785 C23.2@-855,-835 C24.2@-855,-885 R25.2@-855,-940
  Bottom Layer w15: -272.5,-407.5 v1(-265,-400) -295,-370 -295,-335 -250,-290 v1(-250,-285)
  Bottom Layer w20: v1(-3620,-1375) -3620,-1595 v1(-3600,-1615) ; CN1.13@-3342.79,-999.32 -3305.79,-962.32 -3305.79,-842.32 C1.1@-3305.79,-812.32 -3305.79,-740.79 v1(-3305,-740) ; C2.1@-3305.79,-572.32 -3305,-571.54 v1(-3305,-510) ; v1(-3030,-1590) -3030,-1390 v1(-3025,-1385) ; v1(-1800,-1325) -1735,-1260 -1735,-1200 ; v1(-1695,-615) v1(-1695,-660) -1695,-1160 -1735,-1200 ; v1(-1675,-1220) -1695,-1200 -1735,-1200 ; C24.2@-855,-885 -850,-880 -825,-880 -805,-900 C16.2@-725,-900 -690,-900 v1(-677.5,-887.5) -652.5,-862.5 ; -685,-800 -640,-845 C14.2@-635,-845 -652.5,-862.5 ; -655,-381 v1(-655,-400) v1(-610,-400) ; C13.2@-615,-1040 -570,-995 -570,-895 ; v1(-290,-225) -220,-225 -205,-210 -50,-210 ; v1(-285,-895) -570,-895 ; -652.5,-862.5 -602.5,-862.5 -570,-895
  other v1: -1030,-1360 -1780,-1335 -700,-1330 -645,-1330 -605,-1325 -1815,-1315 -1775,-1305 -1790,-1295 -895,-1050
I2C1_SCK: U3.92 | length 3006.6
  Top Layer w8: -1240,-100 -1170,-170 -660,-170 -635,-195 -450,-195 -410,-235 -410,-925 -385,-950 -385,-1305.3 -419.85,-1340.15 v1(-419.85,-1395) ; U3.92@-1236.26,-1297.24 -1236.26,-1398.74 v1(-1225,-1410)
  Bottom Layer w8: v1(-1225,-1410) -1225,-1415 -439.85,-1415 v1(-419.85,-1395)
I2C1_SDA: U3.93 | length 2860.4
  Top Layer w8: U3.93@-1216.57,-1297.24 -1216.57,-1368.43 v1(-1200,-1385) ; -1140,-125 -1120,-145 -645,-145 -615,-175 -445,-175 -395,-225 -395,-918.64 -365,-948.64 -365,-1330 v1(-385,-1350)
  Bottom Layer w8: v1(-1200,-1385) -1195,-1390 -465,-1390 -425,-1350 v1(-385,-1350)
I2S_MCK: U3.64 | length 1765.4
  Top Layer w8: v1(-1915,-1035) -1880,-1035 -1864.69,-1019.69 U3.64@-1612.24,-1019.69 ; v1(-1695,-1545) v1(-1695,-1350) ; v1(-1185,-1610) -1185,-1660 -1140,-1705 -1140,-1785
  Bottom Layer w8: v1@-1920,-1035 v1(-1915,-1035) -1905,-1035 -1885,-1055 -1885,-1145 -1860,-1170 -1860,-1335 -1835,-1360 -1695,-1360 v1(-1695,-1350) ; v1(-1695,-1545) -1690,-1550 -1460,-1550 -1430,-1580 -1195,-1580 -1185,-1590 v1(-1185,-1610)
I2S_SD: U3.91 | length 615.3
  Top Layer w8: U3.91@-1255.94,-1297.24 -1255.5,-1297.69 -1255.5,-1524.5 -1205,-1575 -1180,-1575 -1155,-1600 -1155,-1665 -1110,-1710 -1070,-1710 -1040,-1740 -1040,-1785
INT_GA: P2.19
INT_HMC: P2.22
MDC: U1.31
MDIO: R5.1
MII_RESET: R18.1 U1.29
NetC5_1: C5.1 C6.1 C7.2 C8.2 U1.18 U1.23 U1.37 | length 947.2
  Top Layer w7: C5.1@-2850,-865 C6.1@-2850,-792 -2832,-792 -2770,-730 -2763.58,-723.58 U1.23@-2732.32,-723.58 -2688.58,-723.58 -2640,-675 ; C8.2@-2850,-595 -2795,-595 -2764.84,-625.16 U1.18@-2732.32,-625.16 -2655.16,-625.16 -2655,-625 -2645,-635 -2645,-650 -2640,-655 -2640,-675 ; C7.2@-2340,-765 -2361.73,-743.27 U1.37@-2397.68,-743.27 -2431.73,-743.27 -2455,-720 -2455,-695 -2475,-675 -2640,-675
NetC12_1: C12.1 U3.8 X2.2 | length 387.9
  Top Layer w8: U3.8@-1017.76,-1098.43 -761.57,-1098.43 X2.2@-725,-1135 ; X2.2@-735,-1135 X2.2@-735,-1125
  Bottom Layer w8: X2.2@-735,-1125 C12.1@-665,-1125
NetC13_1: C13.1 U3.9 X2.1 | length 396.7
  Top Layer w8: U3.9@-1017.76,-1078.74 -763.74,-1078.74 X2.1@-735,-1050 ; X2.1@-745,-1050 X2.1@-715,-1050
  Bottom Layer w8: X2.1@-735,-1045 -730,-1040 C13.1@-665,-1040
NetC14_1: C14.1 U3.12 X3.1 | length 468
  Top Layer w8: U3.12@-1017.76,-1019.69 -789.69,-1019.69 -770,-1000 -677,-1000 X3.1@-633,-956 v1(-633,-952)
  Bottom Layer w8: C14.1@-635,-900 -635,-950 v1(-633,-952)
NetC15_2: C15.2 U3.73 | length 115.3
  Top Layer w8: C15.2@-1710,-1225 -1710,-1215 -1691.85,-1196.85 U3.73@-1612.24,-1196.85
NetC16_1: C16.1 U3.13 X3.3 | length 432.3
  Top Layer w8: U3.13@-1017.76,-1000 -791.21,-1000 -776.21,-985 -775,-985 -762.5,-972.5 -762.5,-900.5 -727,-865 X3.3@-727,-832
  Bottom Layer w8: C16.1@-725,-845 -724,-844 v1(-724,-835)
NetC17_1: C17.1 SW3.2 U4.1 U4.3 | length 777.7
  Top Layer w15: U4.3@-2835,-1539.8 -2785.2,-1539.8 -2775,-1529.61 -2775,-1480 -2790,-1465 U4.1@-2835,-1465
  Top Layer w20: SW3.2@-2990,-1785 -2990,-1725 -3075,-1640 -3075,-1475 -3065,-1465 -2965,-1465 C17.1@-2955,-1475
  Top Layer w25: C17.1@-2955,-1475 -2945,-1465 U4.1@-2835,-1465